# Altium PCB PA_test.PcbDoc
Units mm, origin at the board's own origin, x right, y up, seen from the top; angles counter-clockwise.
Board outline 44 x 35 mm, 4 copper layers (Top Layer, Layer 1, Layer 2, Bottom Layer), stack 1.586 mm thick; 28 components, 14 nets, 77 pads, 128 vias.
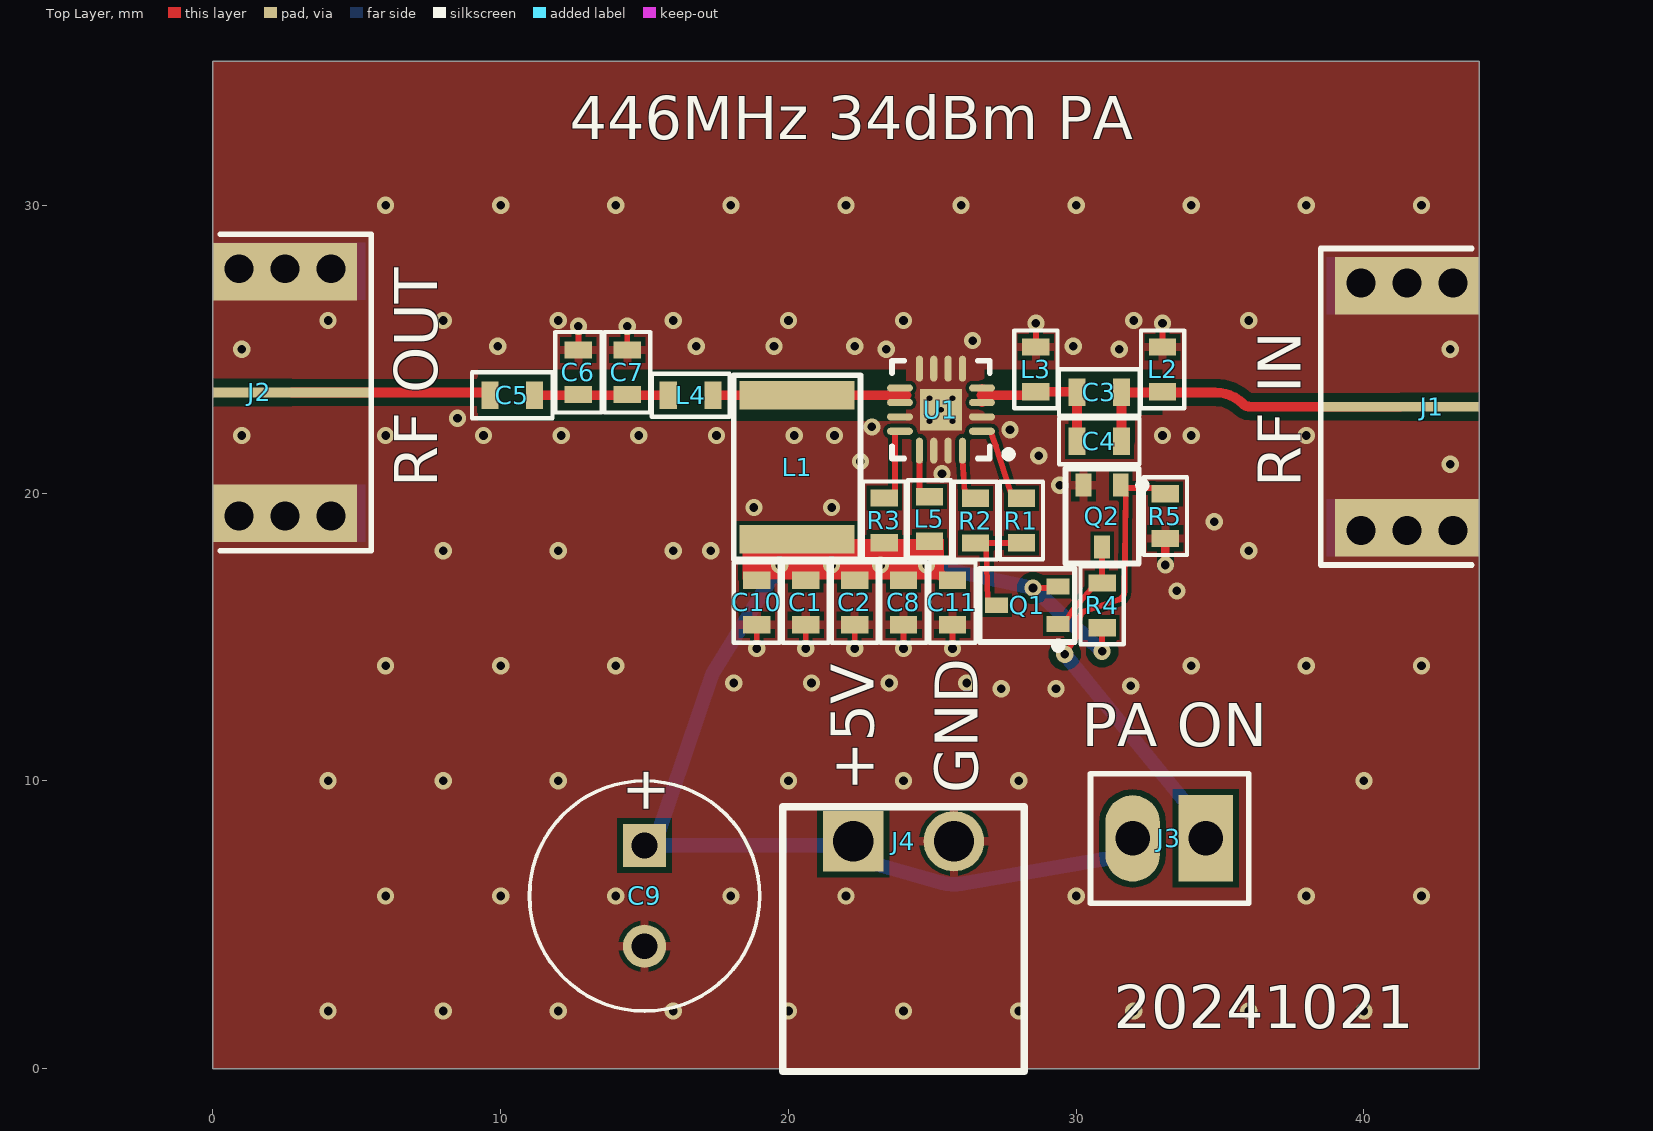
[diagram p0: Top Layer view]
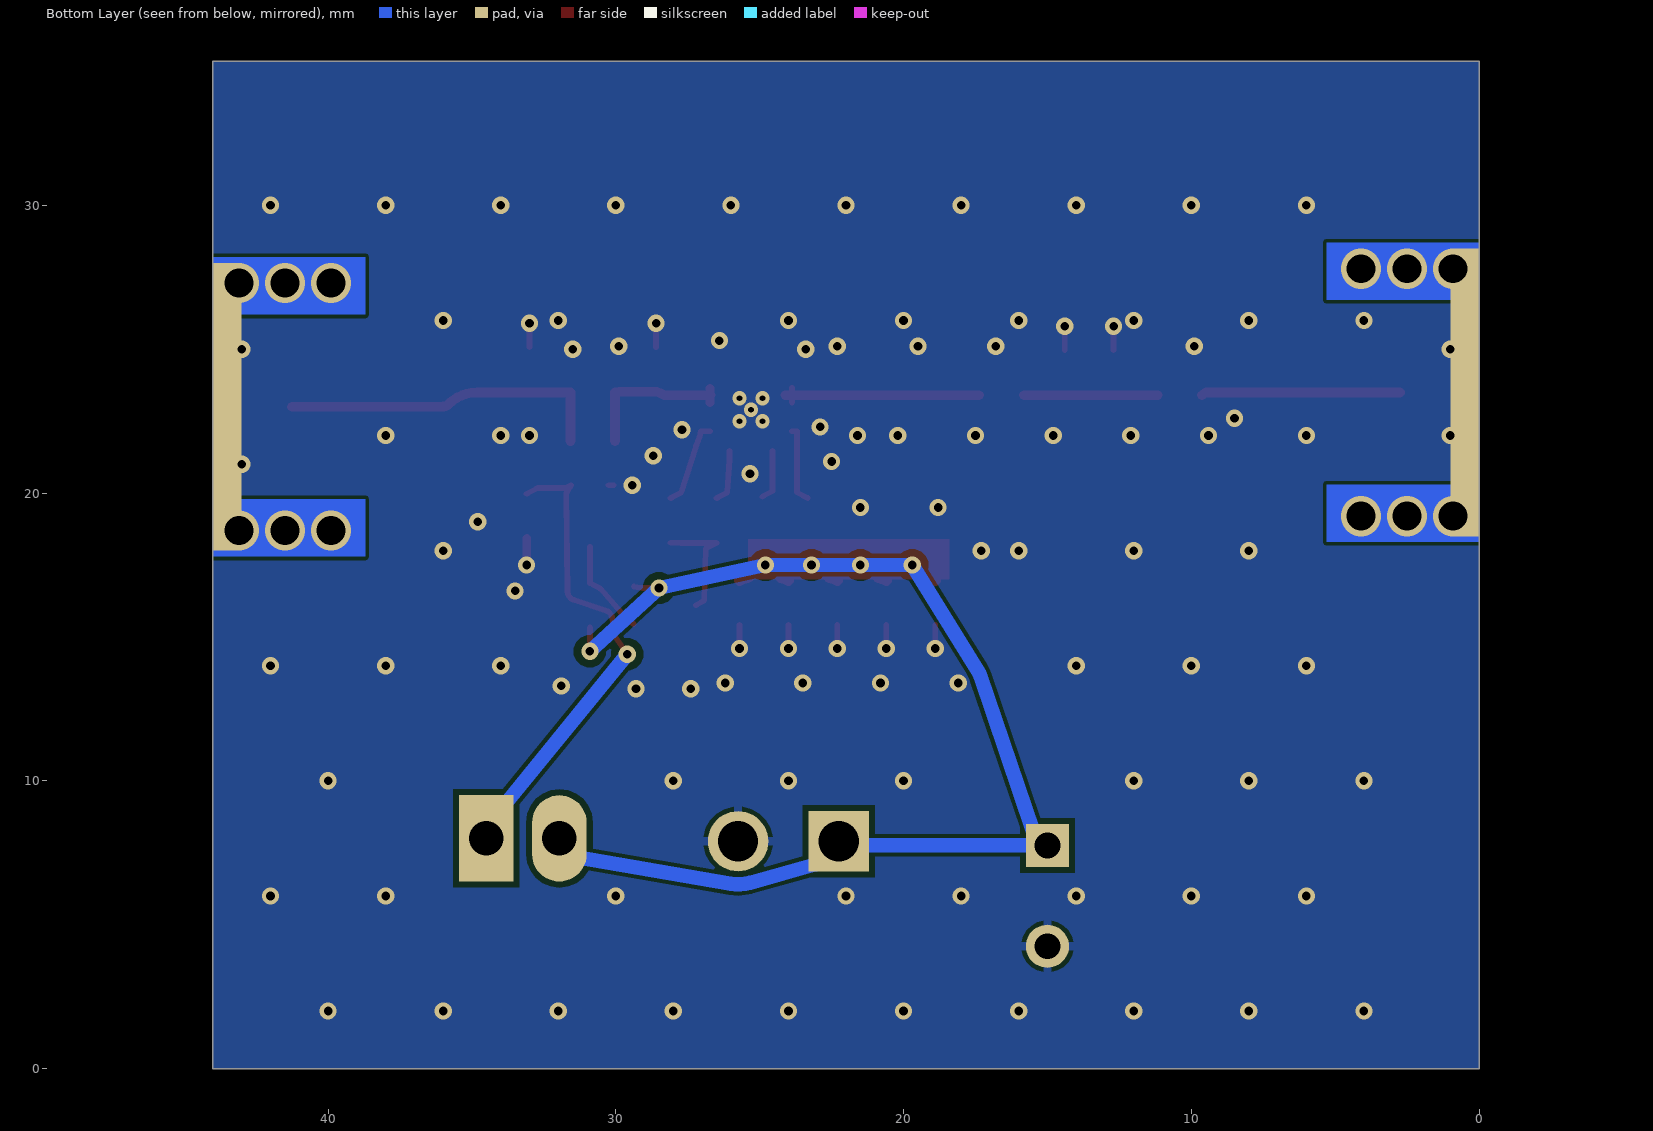
[diagram p1: Bottom Layer view, seen from below]
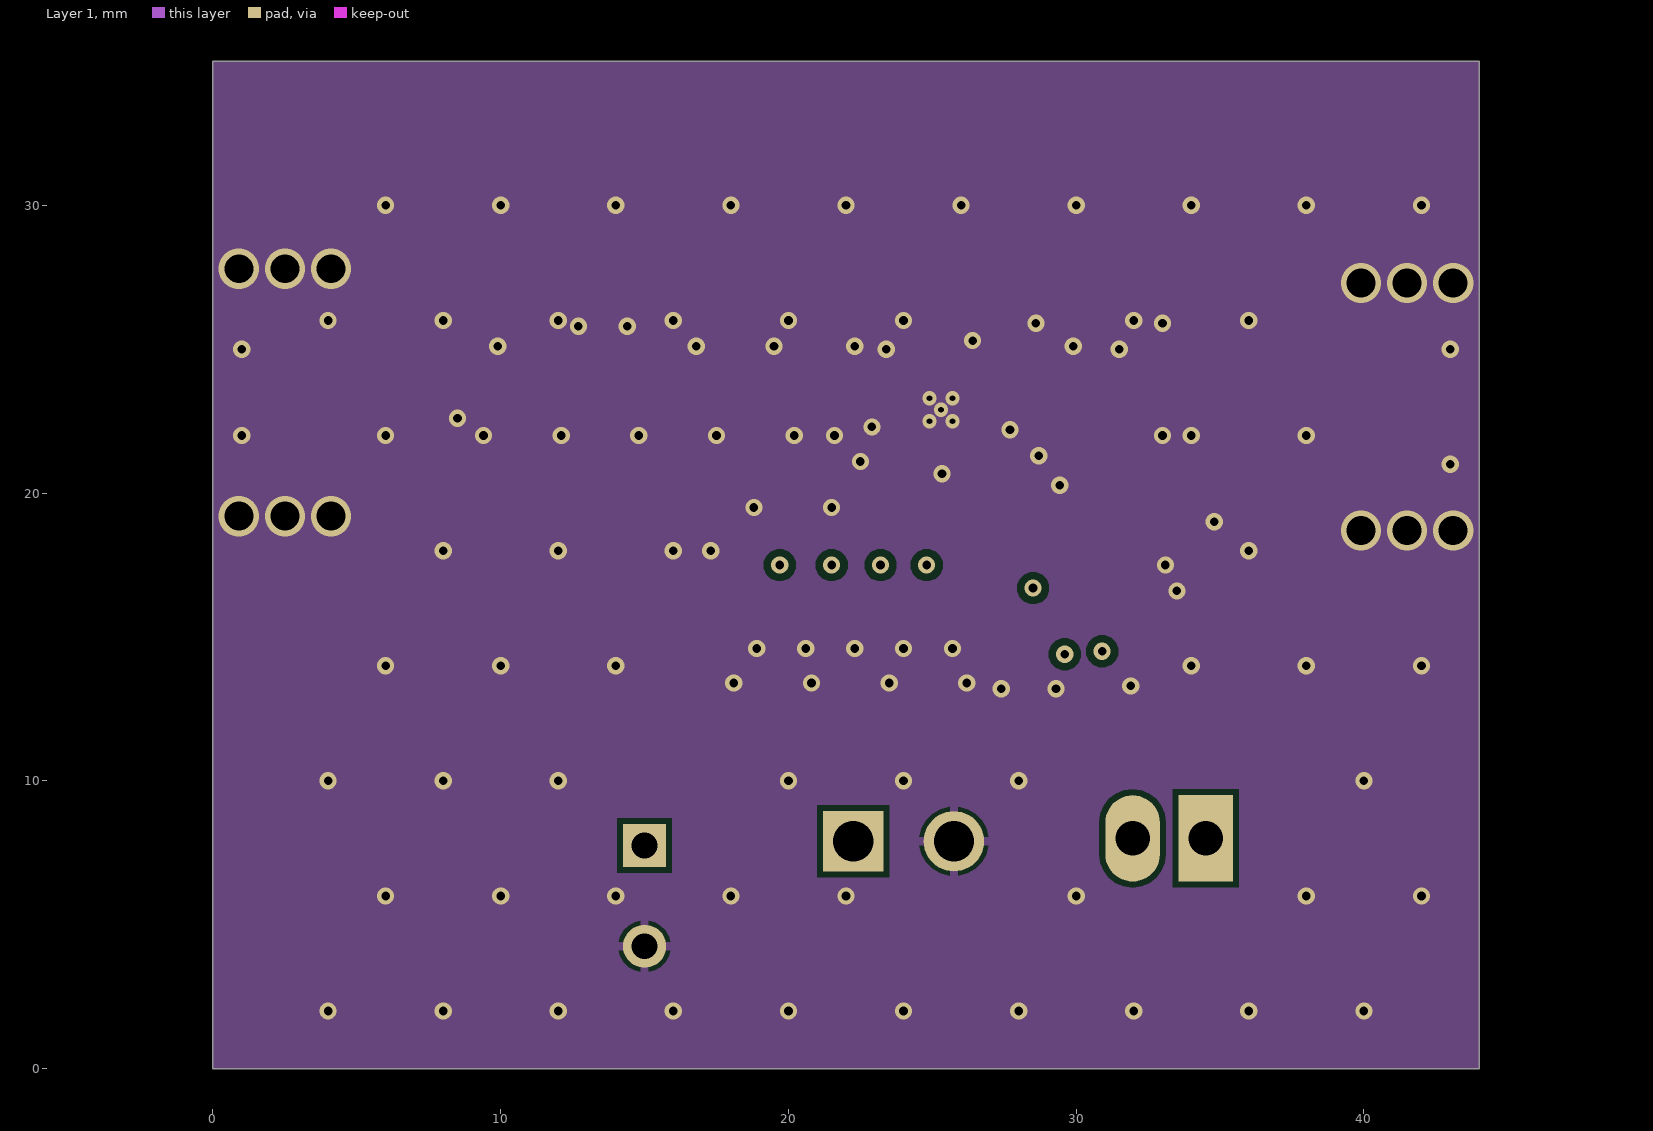
[diagram p2: Layer 1]
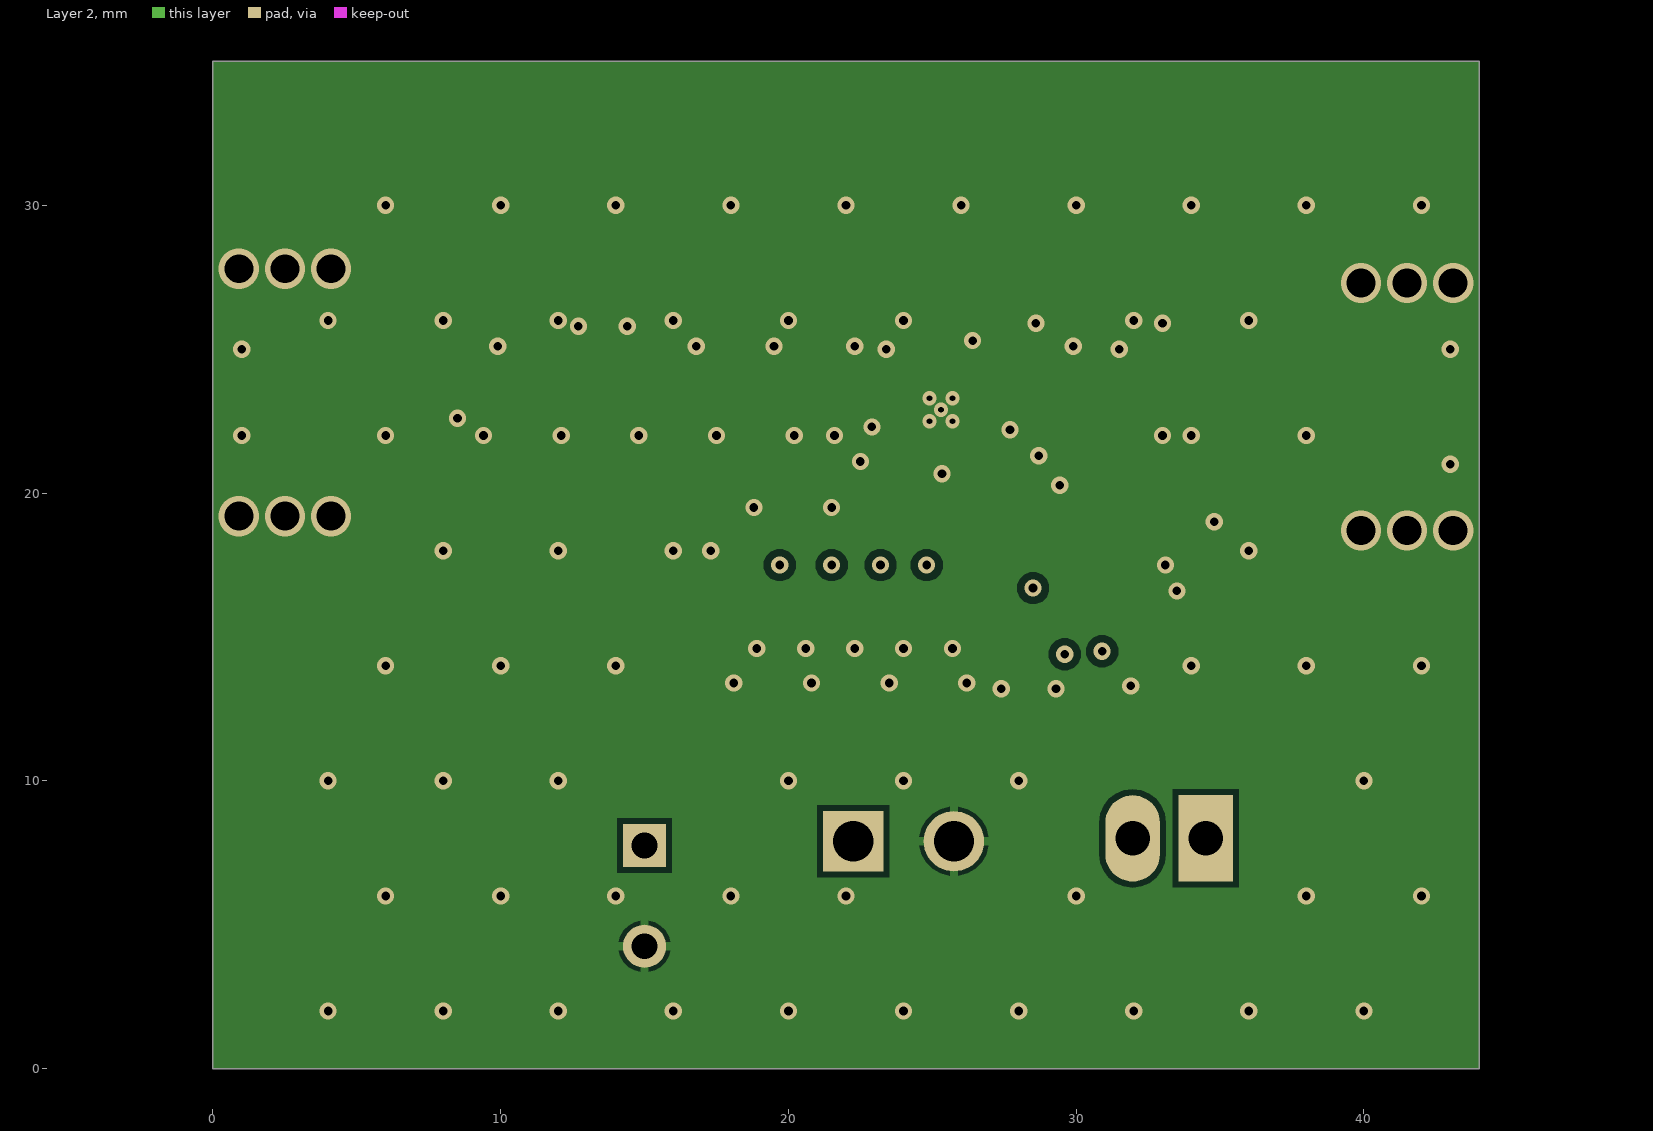
[diagram p3: Layer 2]
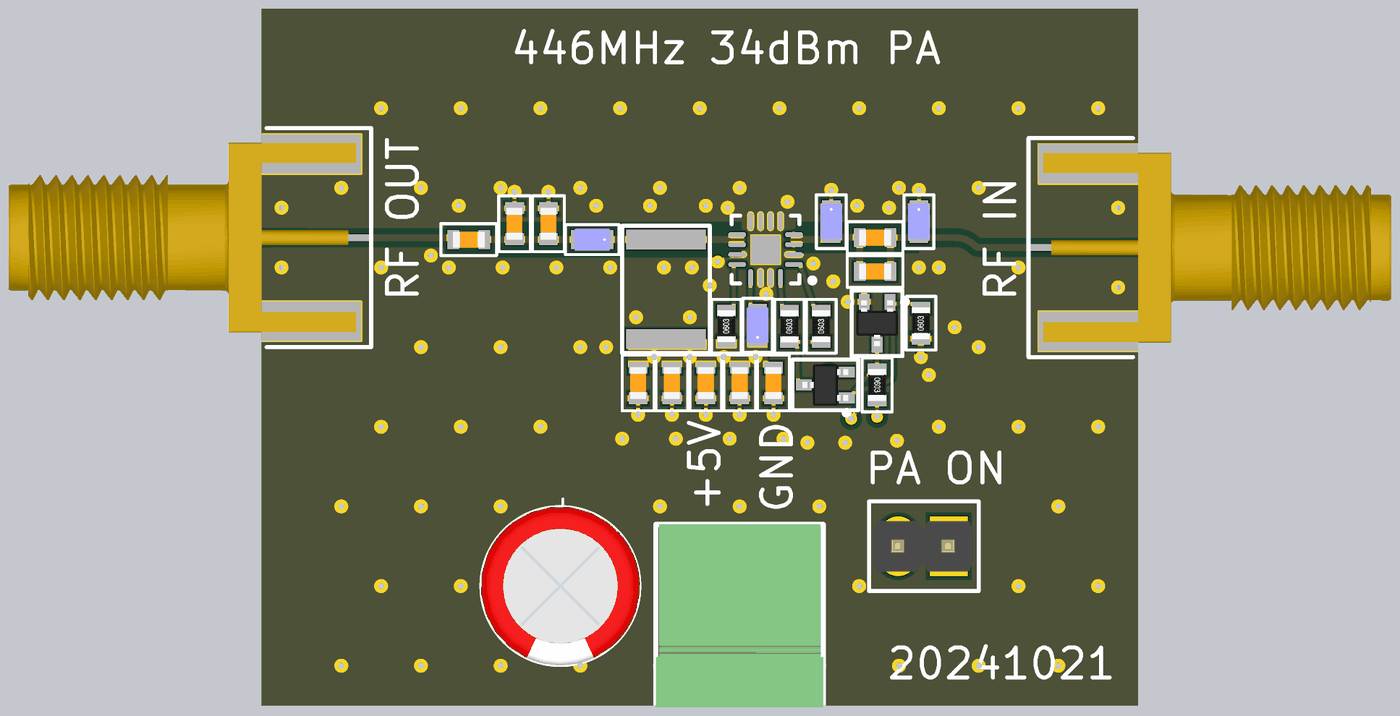
[diagram p4: 3D render of the assembled board from above, using the file's embedded part models]

## Layer stack, top to bottom
Top Solder: solder mask 0.0102, Solder Resist, Dk 3.5
Top Layer: signal copper 0.035
Dielectric 2: prepreg 0.2104, PP-006, Dk 4.1
Layer 1: signal copper 0.0152
Dielectric 1: dielectric 1.065, FR-4, Dk 4.8
Layer 2: signal copper 0.0152
Dielectric 3: prepreg 0.2104, PP-006, Dk 4.1
Bottom Layer: signal copper 0.035
Bottom Solder: solder mask 0.0102, Solder Resist, Dk 3.5

## Board outline
0,0 0,35 44,35 44,0

## Design rules (kind name [scope] priority, off if disabled: settings)
Clearance HW [InNetClass('HV')] p1: gap=0.25 ignorepadtopadclearanceinfootprint=FALSE except(0: Arc-Hole Track-Hole SMDPad-Hole THPad-Hole Via-Hole Fill-Hole Poly-Hole Region-Hole Text-Hole; 0.15: SMDPad-SMDPad)
Clearance "50 ohm GCWG" [InNetClass('50 ohm') vs InNet('GND')] p2: gap=0.3 ignorepadtopadclearanceinfootprint=FALSE except(0: Arc-Hole Track-Hole SMDPad-Hole THPad-Hole Via-Hole Fill-Hole Poly-Hole Region-Hole Text-Hole; 0.127: SMDPad-SMDPad; 0.15: SMDPad-Fill SMDPad-Poly SMDPad-Region; 0.152: Arc-Text Track-Text SMDPad-Text THPad-Text Via-Text Fill-Text Poly-Text Region-Text Text-Text; 0.2: Arc-SMDPad Arc-THPad Track-SMDPad Track-THPad SMDPad-THPad SMDPad-Via THPad-THPad; 0.254: Arc-Via Track-Via Via-Via; 0.5: THPad-Via)
Clearance [All] p3: gap=0.127 ignorepadtopadclearanceinfootprint=FALSE except(0: Arc-Hole Track-Hole SMDPad-Hole THPad-Hole Via-Hole Fill-Hole Poly-Hole Region-Hole Text-Hole; 0.089: Arc-Arc Arc-Track Track-Track; 0.152: Arc-Text Track-Text SMDPad-Text THPad-Text Via-Text Fill-Text Poly-Text Region-Text Text-Text; 0.2: Arc-SMDPad Arc-THPad Track-SMDPad Track-THPad SMDPad-THPad SMDPad-Via THPad-THPad THPad-Fill THPad-Poly THPad-Region; 0.254: Arc-Via Track-Via Via-Via Via-Fill Via-Poly Via-Region; 0.5: THPad-Via)
ComponentClearance [All] p1: gap=0.15 collisioncheckmode=3 verticalgap=0.254 showdistances=FALSE
HoleSize [All] p1: absolutevalues=TRUE maxlimit=6.3 minlimit=0.2 maxpercent=80.000 minpercent=20.000
HoleToHoleClearance HoleToHoleClearance_1 [All vs IsVia] p1: gap=0.2 allowstackedmicrovias=TRUE
HoleToHoleClearance [All] p2: gap=0.45 allowstackedmicrovias=TRUE
MinimumAnnularRing [All] p1: minimumring=0.13
MinimumSolderMaskSliver [All] p1: minsoldermaskwidth=0.1
PlaneConnect [All] p1: planeconnectstyle=Direct reliefexpansion=0.508 reliefentries=4 reliefconductorwidth=0.254 reliefairgap=0.254
PolygonConnect "Free pads to GND" [(ObjectKind = 'Pad') And (Component = 'Free') vs InNet('GND')] p1: connectstyle=Direct reliefconductorwidth=0.254 reliefentries=4 polygonreliefangle="90 Angle" airgapwidth=0.254
PolygonConnect "Footprint connection" [All vs HasFootprint('QFN50P200X200X100_HS-13N') or HasFootprint('QFN50P300X300X80_HS-17M - os') or HasFootprint('QFN32-2') or HasFootprint('MCX_SMD_vertical') or HasFootprint('CONUFL001-SMD-T') or HasFootprint('SMA-5205-TGG')] p2: connectstyle=Direct reliefconductorwidth=0.254 reliefentries=4 polygonreliefangle="90 Angle" airgapwidth=0.254
PolygonConnect "Via connection" [All vs IsVia or IsShieldingVia or IsStitchingVia] p3: connectstyle=Direct reliefconductorwidth=0.254 reliefentries=4 polygonreliefangle="90 Angle" airgapwidth=0.254
PolygonConnect [All] p4: connectstyle=Relief reliefconductorwidth=0.3 reliefentries=4 polygonreliefangle="90 Angle" airgapwidth=0.15
RoutingCorners [All] p1: cornerstyle=45-Degree minsetback=1 maxsetback=2.54
RoutingVias [All] p1: holewidth=0.3 width=0.6 viastyle="Through Hole" minholewidth=0.2 minwidth=0.4 maxholewidth=6 maxwidth=7
SilkToSilkClearance [All] p1: silktosilkclearance=0
SilkToSolderMaskClearance [IsPad] p1: minsilkscreentomaskgap=0.15 clearancetoexposedcopper=TRUE
SolderMaskExpansion SolderMaskExpansion_1 [IsVia] p1: expansion=-0.1 istentingtop=FALSE
SolderMaskExpansion [All] p2: expansion=0.05 istentingtop=FALSE
SupplyNets "Schematic Supply Nets_3" [InNet('+5V')] p1: voltage=0.000
SupplyNets "Schematic Supply Nets" [InNet('GND')] p2: voltage=0.000
UnRoutedNet [All] p1: checkbadconnections=TRUE
Width "50 ohm gcwg w" [InNetClass('50 ohm')] p1: maxlimit=0.342 minlimit=0.25 preferedwidth=0.342 toplayer_minwidth=0.342 midlayer1_maxwidth=0.25 midlayer1_prefwidth=0.25 midlayer2_maxwidth=0.25 midlayer2_prefwidth=0.25 bottomlayer_minwidth=0.342 impedanceprofiledriven=TRUE minimp=50.000000 maximp=50.000000 favimp=50.000000
Width [All] p2: maxlimit=3 minlimit=0.089 preferedwidth=0.2
21 further rules are at their usual default settings.

## Classes and differential pairs
net class "50 ohm": NetC5_2 "PA IN"

## Components (designator, comment, footprint, x,y, rotation, side; value= is the part's Value field where it differs from the comment)
C1 "1u, 25V, X7R" SMD0603 20.6,16.2 r270 top
C2 "1u, 25V, X7R" SMD0603 22.3,16.2 r270 top
C3 "10p 200V 1% C0G" SMD0603 30.8,23.5 r0 top
C4 "10p 200V 1% C0G" SMD0603 30.8,21.8 r0 top
C5 "100p, 250V, C0G" SMD0603 10.4,23.4 r180 top
C6 "47p, 50V, C0G" SMD0603 12.7,24.2 r270 top
C7 "12p 100V C0G 1%" SMD0603 14.4,24.2 r270 top
C8 "1u, 25V, X7R" SMD0603 24,16.2 r270 top
C9 "470uF, ALU 25V" WCAP-ATG8_8x11.5x3.5 15,6 r90 top
C10 "1u, 25V, X7R" SMD0603 18.9,16.2 r270 top
C11 "1u, 25V, X7R" SMD0603 25.7,16.2 r270 top
J1 "SMA-5205-TGG" SMA-5205-TGG 42,23 r270 top
J2 "SMA-5205-TGG" SMA-5205-TGG 2,23.5 r90 top
J3 "61300211121" "Header 2 2.54mm" 34.5,8 r270 top
J4 "691322110002" 691322110002 24,4.5 r0 top
L1 "22nH" Air-Inductor-25nH 20.3,20.9 r270 top
L2 "12n, 2%, 4.1GHz" "SMD0603 - L" 33,24.3 r270 top
L3 "12n, 2%, 4.1GHz" "SMD0603 - L" 28.6,24.3 r270 top
L4 "4n7, 2%, 7.9GHz" "SMD0603 - L" 16.6,23.4 r180 top
L5 "6n8, 2%, 5.8GHz" "SMD0603 - L" 24.9,19.1 r90 top
Q1 "NX3008PBKW" SOT323 28.3,16.1 r180 top
Q2 "NX3008NBKW" SOT323 30.9,19.2 r270 top
R1 "3k3, 1%" "SMD0603 - R" 28.097,19.046 r90 top
R2 "6k8, 1%" "SMD0603 - R" 26.501,19.044 r90 top
R3 "0R" "SMD0603 - R" 23.332,19.052 r90 top
R4 "100k, 1%" "SMD0603 - R" 30.9,16.1 r270 top
R5 "100k, 1%" "SMD0603 - R" 33.1,19.2 r90 top
U1 "GRF5504" "QFN50P300X300X80_HS-17M - OS" 25.3,22.9 r180 top

## Footprints (in the part's own frame and the unit in brackets; to place one, negate y for a bottom-side part, rotate by r counter-clockwise, add the part's x,y. Pads: shape width x height; smd on the part's side, far side on the other; paste and mask are expansions set on the pad)
691322110002 [mm] "Horizontal PCB Header, pitch 3.5mm, 02p"
  rect 2.1x2.1 hole 1.4: 1(-1.75,3.4)
  round 2.1 hole 1.4: 2(1.75,3.4)
  silkscreen extent -4.2,-4.6 4.2,4.6, body extent -4.2,-4.6 4.2,4.6, height 7.3
Air-Inductor-25nH [mm]
  rect 1x4 smd mask+0.05: 1(-2.5,0) 2(2.5,0)
  silkscreen extent -3.2,-2.2 3.2,2.2
"Header 2 2.54mm" [mm]
  rect 3x1.9 hole 1.2: 1(0,0)
  oval 3x1.9 hole 1.2: 2(0,-2.54)
  silkscreen extent -2.25,-4 2.25,1.5, body extent -1.27,-3.84 1.27,1.24, height 8.67
"QFN50P300X300X80_HS-17M - OS" [mm] "QFN, 16-Leads, Body 3,00x3,00mm, Pitch 0,50mm, Thermal Pad 1,45x1,45mm, IPC Low Density"
  oval 0.9x0.25 smd: 1(-1.425,0.75) 2(-1.425,0.25) 3(-1.425,-0.25) 4(-1.425,-0.75) 9(1.425,-0.75) 10(1.425,-0.25) 11(1.425,0.25) 12(1.425,0.75)
  oval 0.25x0.9 smd: 5(-0.75,-1.425) 6(-0.25,-1.425) 7(0.25,-1.425) 8(0.75,-1.425) 13(0.75,1.425) 14(0.25,1.425) 15(-0.25,1.425) 16(-0.75,1.425)
  rect 1.45x1.45 smd: 17(0,0)
  silkscreen extent -2.48,-1.7 1.7,1.7, body extent -1.55,-1.55 1.55,1.55, height 0.8
SMA-5205-TGG [mm]
  rect 0.342x5.5 smd: 1(0,-0.75)
  rect 2x5 smd: 2(-4.2,-0.5) 3(4.2,-0.5)
  rect 10x1 smd far side: 4(0,1.5)
  Bottom Layer region: -5.2,-3.3 -3.2,-3.3 -3.2,2 -5.2,2
  Bottom Layer region: 5.21,2 3.21,2 3.21,-3.3 5.21,-3.3
  silkscreen extent -5.5,-3.5 5.5,1.75, body extent -4.76,-2.75 4.76,14.7, height 4.41
SMD0603 [mm] "2-Leads, Body 1,60x0,85mm(0603), IPC Medium Density"
  rect 0.6x0.95 smd: 1(-0.775,0) 2(0.775,0)
  silkscreen extent -1.4,-0.8 1.4,0.8, body extent -0.8,-0.4 0.8,0.4, height 0.7
"SMD0603 - L" [mm] "2-Leads, Body 1,60x0,85mm(0603), IPC Medium Density"
  rect 0.6x0.95 smd: 1(-0.775,0) 2(0.775,0)
  silkscreen extent -1.35,-0.75 1.35,0.75, body extent -0.88,-0.54 0.87,0.55, height 0.93
"SMD0603 - R" [mm] "2-Leads, Body 1,60x0,85mm(0603), IPC Medium Density"
  rect 0.6x0.95 smd: 1(-0.775,0) 2(0.775,0)
  silkscreen extent -1.35,-0.75 1.35,0.75, body extent -0.8,-0.45 0.8,0.45, height 0.5
SOT323 [mm] "SOT323, 3-Leads, Body 2,00x2,10mm, Pitch 0,65mm, IPC Medium Density"
  rect 0.8x0.55 smd: 1(-1.075,0.65) 2(-1.075,-0.65) 3(1.075,0)
  silkscreen extent -1.65,-1.28 1.65,1.52, body extent -1.15,-1.05 1.15,1.05, height 1
WCAP-ATG8_8x11.5x3.5 [mm] "Aluminum Electrolytic Capacitors, 8x11.5mm"
  rect 1.5x1.5 hole 0.9: 1(1.75,0)
  round 1.5 hole 0.9: 2(-1.75,0)
  silkscreen extent -4,-4 4,4, body extent -3.99,-4 4,4, height 11.81

## Part data
C1 C2 C8 C10 C11: library part CGA3E1X7R1E105K080AC, "CAP CER 1UF 25V X7R 0603", Capacitance=1u, Manufacturer="TDK Corporation", Operating Temperature="-55°C ~ 125°C", Package / Case="0603 (1608 Metric)", Ratings=AEC-Q200, Supplier Part Number 1=810-CGA3E1X7R1E105K, Temperature Coefficient=X7R, Tolerance=±10%, Voltage - Rated=25V, Applications=Automotive, Category=Capacitors, ComponentLink1Description=https://product.tdk.com/info/en/catalog/datasheets/mlcc_automotive_general_en.pdf, ComponentLink1URL=https://product.tdk.com/info/en/catalog/datasheets/mlcc_automotive_general_en.pdf, Failure Rate=-, Features=-, Height - Seated (Max)=-, Lead Spacing=-, Lead Style=-, Manufacturer Part Number=CGA3E1X7R1E105K080AC, Mounting Type="Surface Mount, MLCC", Packaging="Cut Tape (CT)", Part Status=Active, Pricing 1="1=0.2, 10=0.135, 100=0.0686, 500=0.04696, 1000=0.04154 (USD)", RoHS="RoHS Compliant", Size / Dimension="0.063\" L x 0.032\" W (1.60mm x 0.80mm)", Stock 1=109509, Supplier 1=Mouser, Supplier 2=Farnell, Supplier 3=Digi-Key, Supplier Part Number 2=2346962, Supplier Part Number 3=445-6931-1-ND, Thickness (Max)="0.035\" (0.90mm)"
C3 C4: library part 06032U100FAT2A, "Cap Ceramic 10pF 200V C0G 1% Pad SMD 0603 125°C Ultra Low ESR T/R", Capacitance=10p, Manufacturer="Kyocera AVX", Supplier Part Number 1=581-06032U100FAT2A, Category="Ceramic Capacitors", ComponentLink1Description=https://datasheet.ciiva.com/219/useries-219573.pdf?src-supplier=Digi-Key, ComponentLink1URL=https://datasheet.ciiva.com/219/useries-219573.pdf?src-supplier=Digi-Key, ComponentLink2Description=https://datasheet.ciiva.com/16209/useries-16209209.pdf?src-supplier=Future+Electronics, ComponentLink2URL=https://datasheet.ciiva.com/16209/useries-16209209.pdf?src-supplier=Future+Electronics, Manufacturer Part Number=06032U100FAT2A, Pricing 1="1=0.33, 10=0.227, 50=0.227, 100=0.137, 1000=0.087, 10000=0.07 (USD)", RoHS=Yes, Stock 1=12241, Supplier 1=Mouser, Supplier 2="Arrow Electronics", Supplier 3=Newark, Supplier Part Number 2=06032U100FAT2A, Supplier Part Number 3=96Y8278
C5: library part 885342006003, "CAP CER 100PF 250V C0G/NP0 0603", Capacitance=100p, Manufacturer="Wurth Electronics Inc.", Operating Temperature="-55°C ~ 125°C", Package / Case="0603 (1608 Metric)", Ratings=-, Supplier Part Number 1=732-12167-1-ND, Temperature Coefficient="C0G, NP0", Tolerance=±5%, Voltage - Rated=250V, Applications="General Purpose", Category=Capacitors, ComponentLink1Description=https://katalog.we-online.de/pbs/datasheet/885342006003.pdf, ComponentLink1URL=https://katalog.we-online.de/pbs/datasheet/885342006003.pdf, Failure Rate=-, Features=-, Height - Seated (Max)=-, Lead Spacing=-, Lead Style=-, Manufacturer Part Number=885342006003, Mounting Type="Surface Mount, MLCC", Notification="Current market demand for these product types have resulted in fluctuating and extending lead times. Lead times may differ.", Packaging="Cut Tape (CT)", Part Status=Active, Pricing 1="1=0.1, 10=0.043, 100=0.0385, 500=0.03406 (USD)", RoHS="RoHS Compliant", Size / Dimension="0.063\" L x 0.031\" W (1.60mm x 0.80mm)", Stock 1=43, Supplier 1=Digi-Key, Supplier 2=Farnell, Supplier 3=Mouser, Supplier Part Number 2=2812519, Supplier Part Number 3=710-885342006003, Thickness (Max)="0.034\" (0.87mm)"
C6: library part C0603C470J5GACAUTO, "CAP CER 47PF 50V C0G/NP0 0603", Capacitance=47p, Manufacturer=KEMET, Operating Temperature="-55°C ~ 125°C", Package / Case="0603 (1608 Metric)", Ratings=AEC-Q200, Supplier Part Number 1=80-C0603C470J5G, Temperature Coefficient="C0G, NP0", Tolerance=±5%, Voltage - Rated=50V, Applications=Automotive, Category=Capacitors, ComponentLink1Description=https://search.kemet.com/component-edge/download/datasheet/C0603C470J5GACAUTO.pdf, ComponentLink1URL=https://search.kemet.com/component-edge/download/datasheet/C0603C470J5GACAUTO.pdf, Failure Rate=-, Features=-, Height - Seated (Max)=-, Lead Spacing=-, Lead Style=-, Manufacturer Part Number=C0603C470J5GACAUTO, Mounting Type="Surface Mount, MLCC", Packaging="Cut Tape (CT)", Part Status=Active, Pricing 1="1=0.12, 10=0.088, 100=0.0391, 500=0.02792, 1000=0.02193 (USD)", RoHS="RoHS Compliant", Size / Dimension="0.063\" L x 0.032\" W (1.60mm x 0.80mm)", Stock 1=21519, Supplier 1=Mouser, Supplier 2=Farnell, Supplier 3=Digi-Key, Supplier 4=TME, Supplier Part Number 2=1414639, Supplier Part Number 3=399-6890-1-ND, Supplier Part Number 4=C0603C470J5GAC, Thickness (Max)="0.034\" (0.87mm)"
C7: library part 06031U120FAT2A, "Cap Ceramic 12pF 100V C0G 1% SMD 0603 125°C T/R", Capacitance=12p, Case Code (Imperial)=0603, Case Code (Metric)=1608, Dielectric=C0G, Manufacturer="Kyocera AVX", Max Operating Temperature=125°C, Min Operating Temperature=-55°C, Package Quantity=4000, Supplier Part Number 1=581-06031U120FAT2A, Tolerance=1%, Voltage Rating=100V, Case/Package=0603, Category="Ceramic Capacitors", ComponentLink1Description=https://datasheet.ciiva.com/208/useries-208490.pdf?src-supplier=Digi-Key, ComponentLink1URL=https://datasheet.ciiva.com/208/useries-208490.pdf?src-supplier=Digi-Key, Construction=Flat, Depth=0.76mm, Length=1.6mm, Manufacturer Part Number=06031U120FAT2A, Mounting Technology="Surface Mount", Packaging="Tape and Reel", Pricing 1="1=0.33, 10=0.227, 50=0.227, 100=0.137, 1000=0.087, 10000=0.07 (USD)", Radiation Hardening=No, RoHS=Yes, RoHS Compliant=Yes, Series=U, Stock 1=6418, Supplier 1=Mouser, Termination=SMD/SMT, Voltage Rating (DC)=100V, Width=0.81mm
C9: library part 860010474013, "WURTH ELEKTRONIK - 860010474013 - CAP, ALU ELEC, 470UF, 25V, RADIAL", Capacitance=470u, Capacitance Tolerance="± 20%", Capacitor Terminals="Radial Leaded", Lifetime @ Temperature="2000 hours @ 85", Manufacturer="WURTH ELEKTRONIK", Operating Temperature Max=85, Operating Temperature Min=-40, Supplier Part Number 1=2465681, Voltage Rating=25V, Automotive Qualification Standard=-, ComponentLink1Description=http://www.farnell.com/datasheets/1879524.pdf, ComponentLink1URL=http://www.farnell.com/datasheets/1879524.pdf, Diameter=8, ESR=-, Height=11.5, Lead Spacing=3.5, Manufacturer Part Number=860010474013, MSL="MSL 1 - Unlimited", Packaging="Each<!--FANDB--><div class=\"features-and-benefits-container\"><div class=\"features-and-benefits-desc-container\"><span class=\"features-and-benefits-container-desc\">Electrolytic Capacitor, 470 µF, 25 V, WCAP-ATG8 Series, ± 20%, Radial Leaded, 8 mm</span></div></div>", Pricing 1="1=0.313, 3=0.282, 5=0.257, 10=0.232, 20=0.23, 50=0.189, 250=0.18 (GBP)", Product Range="WCAP-ATG8 Series", RoHS=YES, RoHS Phthalates Compliant=Yes, Stock 1=134, Supplier 1=Farnell, Supplier 2=Digi-Key, Supplier 3=Mouser, Supplier Part Number 2=732-8636-1-ND, Supplier Part Number 3=710-860010474013, SVHC="No SVHC (07-Jul-2017)"
J1 J2: "DC to 12.4 GHz, low cost SMA", Manufacturer=Schmid-M, Supplier 1="ATD Electronic", Supplier Part Number 1=SMA-5205-TGG
J3: "CONN HEADER 2 POS 2.54", Current Rating=3A, Insulation Color=Black, Manufacturer="Wurth Electronics Inc.", Material Flammability Rating="UL94 V-0", Operating Temperature="-40°C ~ 125°C", Supplier Part Number 1=710-61300211121, Voltage Rating=250V, Applications=-, Category="Connectors, Interconnects", ComponentLink1Description=https://katalog.we-online.de/em/datasheet/6130xx11121.pdf, ComponentLink1URL=https://katalog.we-online.de/em/datasheet/6130xx11121.pdf, Connector Type=Header, Contact Finish - Mating=Gold, Contact Finish - Post=-, Contact Finish Thickness - Mating=-, Contact Finish Thickness - Post=-, Contact Length - Mating="0.236\" (6.00mm)", Contact Length - Post="0.118\" (3.00mm)", Contact Material="Copper Alloy", Contact Shape=Square, Contact Type="Male Pin", Fastening Type=Push-Pull, Features=-, Ingress Protection=-, Insulation Height="0.100\" (2.54mm)", Insulation Material="Polybutylene Terephthalate (PBT)", Manufacturer Part Number=61300211121, Mated Stacking Heights=-, Mounting Type="Through Hole", Number of Positions=2, Number of Positions Loaded=All, Number of Rows=1, Overall Contact Length="0.454\" (11.54mm)", Packaging=Bulk, Part Status=Active, Pitch - Mating="0.100\" (2.54mm)", Pricing 1="1=0.13, 10=0.106, 25=0.088, 50=0.074, 100=0.067, 1000=0.061 (USD)", RoHS="RoHS Compliant", Row Spacing - Mating=-, Shrouding=Unshrouded, Stock 1=164911, Style="Board to Board or Cable", Supplier 1=Mouser, Supplier 2=Farnell, Supplier 3=Digi-Key, Supplier Part Number 2=2356153, Supplier Part Number 3=732-5315-ND, Termination=Solder
J4: "WR-TBL Serie 3221 - 3.50 mm Horizontal PCB Header, 02p", Supplier Part Number 1=732-2769-ND, ComponentLink1Description=Manufacturer, ComponentLink1URL=http://www.we-online.de, ComponentLink2Description=Datasheet, ComponentLink2URL=http://katalog.we-online.de/em/datasheet/6913221100xx.pdf, Part Number=691322110002, Pin Number=02p, Pitch="3.5 mm", Published Date="Jan 2017", Publisher="Wurth Elektronik", Supplier 1=Digi-Key, Supplier 2=Farnell, Supplier 3=Mouser, Supplier Part Number 2=1841315, Supplier Part Number 3=710-691322110002
L1: library part Air-Inductor_20nH
L2 L3: library part 0603HP-12NXGLU, "Fixed Inductors 0603HP Hi Perfrmnce 12 nH 2 % 1.1 A", Case Code (Imperial)=0603, Case Code (Metric)=1608, Current Rating=1.1A, DC Resistance (DCR)=88mR, Inductance=12n, Inductance Tolerance=2%, Manufacturer=Coilcraft, Max Operating Temperature=125°C, Min Operating Temperature=-40°C, Self Resonant Frequency=4.1GHz, Supplier Part Number 1=994-0603HP-12NXGLU, Test Frequency=250MHz, Case/Package=0603, ComponentLink1Description=https://datasheet.ciiva.com/13167/0603hp-13167775.pdf?src-supplier=Mouser, ComponentLink1URL=https://datasheet.ciiva.com/13167/0603hp-13167775.pdf?src-supplier=Mouser, ComponentLink2Description=https://datasheet.ciiva.com/22680/1681881-22680847.pdf?src-supplier=Element14, ComponentLink2URL=https://datasheet.ciiva.com/22680/1681881-22680847.pdf?src-supplier=Element14, Core Material=Ceramic, Height=0.94mm, Lead Free="Contains Lead", Length=1.75mm, Manufacturer Part Number=0603HP-12NXGLU, Max DC Current=1.1A, Mount="Surface Mount", Packaging="Cut Tape", Pricing 1="1=1.18000, 10=1.18000, 50=1.18000, 100=1.18000, 200=0.89000, 500=0.66000, 1000=0.44000, 2000=0.40500 (USD)", Q Factor=91, REACH SVHC="No SVHC", RoHS=Yes, Stock 1=1052, Supplier 1=Mouser, Supplier 2=Farnell, Supplier Part Number 2=2286146, Termination=SMD/SMT, Tolerance=2%, Width=1.09mm
L4: library part 0603HP-4N7XGLU, "Fixed Inductors 0603HP Hi Perfrmnce 4.7 nH 2 % 1.1 A", Case Code (Imperial)=0603, Case Code (Metric)=1608, Current Rating=1.1A, DC Resistance (DCR)=100mR, Inductance=4n7, Inductance Tolerance=2%, Manufacturer=Coilcraft, Max Operating Temperature=125°C, Min Operating Temperature=-40°C, Self Resonant Frequency=7.9GHz, Supplier Part Number 1=994-0603HP-4N7XGLU, Test Frequency=250MHz, Case/Package=0603, ComponentLink1Description=https://datasheet.ciiva.com/22680/1681881-22680887.pdf?src-supplier=Element14, ComponentLink1URL=https://datasheet.ciiva.com/22680/1681881-22680887.pdf?src-supplier=Element14, Core Material=Ceramic, Height=0.94mm, Lead Free="Contains Lead", Length=1.75mm, Manufacturer Part Number=0603HP-4N7XGLU, Max DC Current=1.1A, Mount="Surface Mount", Packaging="Cut Tape", Pricing 1="1=1.50000, 10=1.40000, 50=1.22000, 100=1.12000, 200=1.06000, 500=0.74800, 1000=0.47800, 2000=0.40500 (USD)", Q Factor=75, REACH SVHC="No SVHC", RoHS=Yes, Stock 1=884, Supplier 1=Mouser, Supplier 2=Farnell, Supplier Part Number 2=2286132, Termination=SMD/SMT, Tolerance=2%, Width=1.09mm
L5: library part 0603HP-6N8XGLU, "Fixed Inductors RF Chip Inductor 6.8 nH 2 % 1.4 A", Case Code (Imperial)=0603, Case Code (Metric)=1608, Current Rating=1.4A, DC Resistance (DCR)=42mR, Inductance=6n8, Inductance Tolerance=2%, Manufacturer=Coilcraft, Max Operating Temperature=125°C, Min Operating Temperature=-40°C, Self Resonant Frequency=5.8GHz, Supplier Part Number 1=994-0603HP-6N8XGLU, Test Frequency=250MHz, Case/Package=0603, ComponentLink1Description=https://datasheet.ciiva.com/22680/1681881-22680901.pdf?src-supplier=Element14, ComponentLink1URL=https://datasheet.ciiva.com/22680/1681881-22680901.pdf?src-supplier=Element14, ComponentLink2Description=https://datasheet.ciiva.com/13143/0603hp-13143195.pdf?src-supplier=Mouser, ComponentLink2URL=https://datasheet.ciiva.com/13143/0603hp-13143195.pdf?src-supplier=Mouser, ComponentLink3Description=https://datasheet.ciiva.com/22709/1681881-22709629.pdf?src-supplier=Element14, ComponentLink3URL=https://datasheet.ciiva.com/22709/1681881-22709629.pdf?src-supplier=Element14, Core Material=Ceramic, Height=0.94mm, Lead Free="Contains Lead", Length=1.75mm, Manufacturer Part Number=0603HP-6N8XGLU, Max DC Current=1.4A, Mount="Surface Mount", Packaging="Cut Tape", Pricing 1="1=1.18000, 10=1.18000, 50=1.18000, 100=1.18000, 200=0.89000, 500=0.66000, 1000=0.44000, 2000=0.40500 (USD)", Q Factor=143, REACH SVHC="No SVHC", RoHS=Yes, Stock 1=1868, Supplier 1=Mouser, Supplier 2=Farnell, Supplier Part Number 2=2286136, Termination=SMD/SMT, Tolerance=2%, Width=1.09mm
Q1: "NXP - NX3008PBKW - MOSFET, P CH, 30V, 200MA, SOT323", Continuous Drain Current Id=-200, Drain Source Voltage Vds=-30, Manufacturer=NXP, On Resistance Rds(on)=2.8, Operating Temperature Max=150, Operating Temperature Min=-55, Operating Temperature Range="-55°C to +150", Power Dissipation Pd=260, Pulse Current Idm=-0.8, Rds(on) Test Voltage Vgs=-4.5, Supplier Part Number 1=2069551, Threshold Voltage Vgs=-900, Transistor Case Style=SOT-323, Voltage Vgs th Max="8V<!--FANDB--><div class=\"features-and-benefits-container\"><div class=\"features-and-benefits-description\"><span class=\"features-benefits-value\">The NX3008PBKW is a P-channel enhancement mode Field-Effect Transistor (FET) in surface mount plastic package using Trench MOSFET technology. Suitable for relay driver, high-speed line driver and high-side loadswitch.</span></div><div class=\"features-and-benefits-list\"><ul class=\"features-and-benefits-list-list\"><li class=\"features-and-benefits-list-item\">Logic-level compatible</li><li class=\"features-and-benefits-list-item\">Very fast switching</li><li class=\"features-and-benefits-list-item\">AEC-Q101 Qualified</li><li class=\"features-and-benefits-list-item\">Up to 1", Automotive Qualification Standard=-, ComponentLink1Description=http://www.farnell.com/datasheets/1508398.pdf, ComponentLink1URL=http://www.farnell.com/datasheets/1508398.pdf, Manufacturer Part Number=NX3008PBKW, MSL="MSL 1 - Unlimited", No. of Pins=3, Pricing 1="1=0.037, 25=0.0347, 100=0.0323, 250=0.03, 500=0.0294, 2000=0.0288, 4000=0.0282, 20000=0.0276 (GBP)", Product Range=-, RoHS=YES, Stock 1=18626, Supplier 1=Farnell, Supplier 2=Digi-Key, Supplier Part Number 2=568-10503-1-ND, SVHC="No SVHC (17-Dec-2015)", Transistor Polarity="P Channel"
Q2: "NXP - NX3008NBKW - MOSFET, N CH, 30V, 350MA, SOT323", Continuous Drain Current Id=350, Drain Source Voltage Vds=30, Manufacturer=NXP, On Resistance Rds(on)=1, Operating Temperature Max=150, Operating Temperature Min=-55, Operating Temperature Range="-55°C to +150", Power Dissipation Pd=260, Pulse Current Idm=-0.8, Rds(on) Test Voltage Vgs=4.5, Supplier Part Number 1=771-NX3008NBKW,115, Threshold Voltage Vgs=900, Transistor Case Style=SOT-323, Voltage Vgs th Max=8, Automotive Qualification Standard=-, ComponentLink1Description=http://www.farnell.com/datasheets/1508392.pdf, ComponentLink1URL=http://www.farnell.com/datasheets/1508392.pdf, Manufacturer Part Number=NX3008NBKW, MSL="MSL 1 - Unlimited", No. of Pins=3, Pricing 1="1=0.0425, 25=0.0385, 100=0.0347, 250=0.0334, 500=0.0312, 2000=0.0291, 4000=0.0282, 20000=0.0273 (GBP)", Product Range=-, RoHS=YES, Stock 1=4764, Supplier 1=Mouser, Supplier 2=Farnell, Supplier 3=Arrow, Supplier Part Number 2=2069546, Supplier Part Number 3=NX3008NBKW,115, SVHC="No SVHC (17-Dec-2015)", Transistor Polarity="N Channel"
R1: library part RC0603FR-073K3L, "YAGEO - RC0603FR-073K3L - SMD Chip Resistor, 0603 [1608 Metric], 3.3 kohm, RC Series, 75 V, Thick Film, 100 mW", Case Code (Imperial)=0603, Case Code (Metric)=1608, Manufacturer=Yageo, Max Operating Temperature=155°C, Max Power Dissipation=100mW, Min Operating Temperature=-55°C, Package Quantity=1, Resistance=3k3, Supplier Part Number 1=603-RC0603FR-073K3L, Temperature Coefficient=100ppm/°C, Tolerance=1%, Voltage Rating=50V, Case/Package=0603, Category="Chip SMD Resistors", ComponentLink1Description=https://datasheet.ciiva.com/2453/pyu-r-int-thick-7-2453926.pdf?src-supplier=Digi-Key, ComponentLink1URL=https://datasheet.ciiva.com/2453/pyu-r-int-thick-7-2453926.pdf?src-supplier=Digi-Key, ComponentLink2Description=https://datasheet.ciiva.com/2453/pyu-r-int-thick-7-2453927.pdf?src-supplier=Digi-Key, ComponentLink2URL=https://datasheet.ciiva.com/2453/pyu-r-int-thick-7-2453927.pdf?src-supplier=Digi-Key, ComponentLink3Description=https://datasheet.ciiva.com/7746/443971-7746344.pdf?src-supplier=Element14, ComponentLink3URL=https://datasheet.ciiva.com/7746/443971-7746344.pdf?src-supplier=Element14, ComponentLink4Description=https://datasheet.ciiva.com/7746/1686128-7746345.pdf?src-supplier=Element14, ComponentLink4URL=https://datasheet.ciiva.com/7746/1686128-7746345.pdf?src-supplier=Element14, ComponentLink5Description=https://datasheet.ciiva.com/46440/1868787-46440905.pdf?src-supplier=Element14, ComponentLink5URL=https://datasheet.ciiva.com/46440/1868787-46440905.pdf?src-supplier=Element14, ComponentLink6Description=https://datasheet.ciiva.com/7746/443971-7746346.pdf?src-supplier=Element14, ComponentLink6URL=https://datasheet.ciiva.com/7746/443971-7746346.pdf?src-supplier=Element14, Composition="Thick Film", Depth=0.8mm, Features="Moisture Resistant", Height=0.45mm, Lead Free="Lead Free", Length=1.6mm, Manufacturer Part Number=RC0603FR-073K3L, Military Standard=Not, Number of Pins=2, Number of Terminations=2, Packaging="Tape and Reel", Power Rating=100mW, Pricing 1="1=0,10000, 10=0,01800, 100=0,00600, 1000=0,00500, 5000=0,00300, 10000=0,00300 (USD)", REACH SVHC="No SVHC", RoHS=Yes, Stock 1=695285, Supplier 1=Mouser, Supplier 2=Farnell, Supplier 3=Digi-Key, Supplier Part Number 2=2421870, Supplier Part Number 3=311-3.30KHRCT-ND, Termination=SMD/SMT, Voltage Rating (DC)=50V, Width=0.8mm
R2: library part RC0603FR-076K8L, "Res Thick Film 0603 6.8K Ohm 1% 0.1W(1/10W) ±100ppm/C Pad SMD T/R", Case Code (Imperial)=0603, Case Code (Metric)=1608, Manufacturer=Yageo, Max Operating Temperature=155°C, Max Power Dissipation=100mW, Min Operating Temperature=-55°C, Package Quantity=1, Resistance=6k8, Supplier Part Number 1=603-RC0603FR-076K8L, Temperature Coefficient=100ppm/°C, Tolerance=1%, Voltage Rating=50V, Case/Package=0603, Category="Chip SMD Resistors", ComponentLink1Description=https://datasheet.ciiva.com/46412/443971-46412856.pdf?src-supplier=Element14, ComponentLink1URL=https://datasheet.ciiva.com/46412/443971-46412856.pdf?src-supplier=Element14, ComponentLink2Description=https://datasheet.ciiva.com/7746/443971-7746394.pdf?src-supplier=Element14, ComponentLink2URL=https://datasheet.ciiva.com/7746/443971-7746394.pdf?src-supplier=Element14, ComponentLink3Description=https://datasheet.ciiva.com/7746/443971-7746395.pdf?src-supplier=Element14, ComponentLink3URL=https://datasheet.ciiva.com/7746/443971-7746395.pdf?src-supplier=Element14, ComponentLink4Description=https://datasheet.ciiva.com/2454/pyu-r-int-thick-7-2454156.pdf?src-supplier=Digi-Key, ComponentLink4URL=https://datasheet.ciiva.com/2454/pyu-r-int-thick-7-2454156.pdf?src-supplier=Digi-Key, ComponentLink5Description=https://datasheet.ciiva.com/2454/pyu-r-int-thick-7-2454157.pdf?src-supplier=Digi-Key, ComponentLink5URL=https://datasheet.ciiva.com/2454/pyu-r-int-thick-7-2454157.pdf?src-supplier=Digi-Key, ComponentLink6Description=https://datasheet.ciiva.com/2454/pyu-r-int-thick-7-2454158.pdf?src-supplier=Digi-Key, ComponentLink6URL=https://datasheet.ciiva.com/2454/pyu-r-int-thick-7-2454158.pdf?src-supplier=Digi-Key, ComponentLink7Description=https://datasheet.ciiva.com/7983/443971-7983662.pdf?src-supplier=Element14, ComponentLink7URL=https://datasheet.ciiva.com/7983/443971-7983662.pdf?src-supplier=Element14, ComponentLink8Description=https://datasheet.ciiva.com/46371/1868787-46371519.pdf?src-supplier=Element14, ComponentLink8URL=https://datasheet.ciiva.com/46371/1868787-46371519.pdf?src-supplier=Element14, Composition="Thick Film", Depth=0.8mm, Features="Moisture Resistant", Height=0.022inch, Lead Free="Lead Free", Length=0.063inch, Manufacturer Part Number=RC0603FR-076K8L, Military Standard=Not, Number of Pins=2, Number of Terminations=2, Packaging="Tape and Reel", Power Rating=100mW, Pricing 1="1=0,10000, 10=0,01800, 100=0,00600, 1000=0,00500, 5000=0,00300, 10000=0,00300 (USD)", REACH SVHC="No SVHC", RoHS=Yes, Stock 1=241804, Supplier 1=Mouser, Supplier 2=Farnell, Supplier 3=Digi-Key, Supplier Part Number 2=2421883, Supplier Part Number 3=311-6.80KHRCT-ND, Termination=SMD/SMT, Voltage Rating (DC)=50V, Width=0.031inch
R3: library part CRCW06030000Z0EA, "RES SMD 0 OHM JUMPER 1/10W 0603", Manufacturer="Vishay Dale", Operating Temperature="-55°C ~ 155°C", Package / Case="0603 (1608 Metric)", Power (Watts)="0.1W, 1/10W", Supplier Device Package=0603, Supplier Part Number 1=71-CRCW0603-0-E3, Temperature Coefficient=-, Tolerance=Jumper, Category=Resistors, ComponentLink1Description=http://www.vishay.com/docs/20035/dcrcwe3.pdf, ComponentLink1URL=http://www.vishay.com/docs/20035/dcrcwe3.pdf, Composition="Thick Film", Failure Rate=-, Features="Automotive AEC-Q200", Height - Seated (Max)="0.020\" (0.50mm)", Manufacturer Part Number=CRCW06030000Z0EA, Packaging="Cut Tape (CT)", Part Status=Active, Pricing 1="1=0.1, 10=0.028, 25=0.0204, 50=0.0154, 100=0.0114, 250=0.00868, 500=0.00694, 1000=0.00511 (USD)", Resistance=0R, RoHS="RoHS Compliant", Size / Dimension="0.063\" L x 0.033\" W (1.60mm x 0.85mm)", Stock 1=0, Supplier 1=Mouser, Supplier 2=Farnell, Supplier 3=Digi-Key, Supplier Part Number 2=1469739, Supplier Part Number 3=541-0.0GCT-ND
R4 R5: library part RC0603FR-07100KL, "RES SMD 100K OHM 1% 1/10W 0603", Manufacturer=Yageo, Operating Temperature="-55°C ~ 155°C", Package / Case="0603 (1608 Metric)", Power (Watts)="0.1W, 1/10W", Resistance=100k, Supplier Device Package=0603, Supplier Part Number 1=603-RC0603FR-07100KL, Temperature Coefficient=±100ppm/°C, Tolerance=±1%, Category=Resistors, ComponentLink1Description=http://www.yageo.com/documents/recent/PYu-RC_Group_51_RoHS_L_8.pdf, ComponentLink1URL=http://www.yageo.com/documents/recent/PYu-RC_Group_51_RoHS_L_8.pdf, Composition="Thick Film", Failure Rate=-, Features="Moisture Resistant", Height - Seated (Max)="0.022\" (0.55mm)", Manufacturer Part Number=RC0603FR-07100KL, Packaging="Cut Tape (CT)", Part Status=Active, Pricing 1="1=0.1, 10=0.015, 100=0.006, 1000=0.00268, 2500=0.00233 (USD)", RoHS="RoHS Compliant", Size / Dimension="0.063\" L x 0.032\" W (1.60mm x 0.80mm)", Stock 1=14618646, Supplier 1=Mouser, Supplier 2=Farnell, Supplier 3=Digi-Key, Supplier Part Number 2=9238727, Supplier Part Number 3=311-100KHRCT-ND
U1: "Amplifier, Power, 0.4–0.5 GHz, 41.0 dB, 34.8 dBm, 3.0 x 3.0 mm QFN-16", Manufacturer="Guerrilla RF", Supplier Part Number 1=459-GRF5504, Category=LDO, Manufacturer Part Number=GRF5504, Pricing 1="1=6.08, 10=5.78, 50=5.78, 100=5.33, 1000=2.39, 10000=2.03 (USD)", RoHS=No, Stock 1=6789, Supplier 1=Mouser, Supplier 2="Richardson RFPD", Supplier Part Number 2=GRF5504

## Via types
v1: diameter 0.6, hole 0.3, Top Layer to Bottom Layer, 111 vias
v2: diameter 1.4, hole 1, Top Layer to Bottom Layer, 12 vias
v3: diameter 0.5, hole 0.2, Top Layer to Bottom Layer, 5 vias

## Nets (pads, with @x,y where several pads share a name; then routed paths per layer and width w, separated by ;. In a path a pad name is that pad's centre, name@x,y a point inside that pad or via, vN(x,y) a via of type N, cw(c..) or ccw(c..) an arc to the next point about the centre after c; other vN are vias at no path point)
+5V: C1.1 C2.1 C8.1 C9.1 C10.1 C11.1 J3.2 J4.1 L1.2 L5.1 Q1.2 R3.1 R4.2 | length 48.1
  Top Layer w0.2: v1(28.5,16.7) 29.075,16.7 Q1.2 ; v1(30.9,14.5) R4.2
  Top Layer w0.4: C10.1 19.175,17.075 19.175,17.2 v1(19.7,17.5) ; C1.1 20.875,17.075 20.875,17.2 v1(21.5,17.5) ; C2.1 22.575,17.075 22.575,17.2 v1(23.2,17.5) ; C8.1 24.275,17.075 24.275,17.2 v1(24.8,17.5) 25.2,17.2 25.425,17.075 C11.1
  Bottom Layer w0.5: v1(30.9,14.5) v1(28.5,16.7) v1(24.8,17.5) v1(19.7,17.5) 17.417,13.824 ccw(c18.1,13.4) 17.339,13.659 15.5,8.25 C9.1 15.5,7.76 21.45,7.76 J4.1 23.05,7.1 25.345,6.456 ccw(c25.75,7.9) 26.005,6.422 31.96,7.45 J3.2
"+5V BIAS": Q1.3 R1.1 R2.1 | length 4.2
  Top Layer w0.2: Q1.3 26.925,16.275 26.876,18.069 R2.1 26.876,18.269 27.722,18.269 R1.1
GND: C1.2 C2.2 C6.1 C7.1 C8.2 C9.2 C10.2 C11.2 J1.2 J1.3 J1.4 J2.2 J2.3 J2.4 J4.2 L2.1 L3.1 Q2.2 R5.1 U1.2 U1.5 U1.6 U1.7 U1.8 U1.11 U1.14 U1.15 U1.17 | length 8.5
  Top Layer w0.2: C6.1 12.7,25.175 v1(12.7,25.8) ; C7.1 14.4,25.175 v1(14.4,25.8) ; v1(18.9,14.6) 18.9,15.225 C10.2 ; v1(20.6,14.6) 20.6,15.225 C1.2 ; v1(22.3,14.6) 22.3,15.225 C2.2 ; v1(24,14.6) 24,15.225 C8.2 ; v1(25.7,14.6) 25.7,15.225 C11.2 ; L3.1 28.6,25.275 v1(28.6,25.9) ; Q2.2@30.075,20.275 Q2.2 ; L2.1 33,25.275 v1(33,25.9)
  Top Layer w0.3: v1(33.1,17.5) R5.1
  other v1: 4,2 8,2 12,2 16,2 20,2 24,2 28,2 32,2 36,2 40,2 6,6 10,6 14,6 18,6 22,6 30,6 38,6 42,6 4,10 8,10 12,10 20,10 24,10 28,10 40,10 27.4,13.2 29.3,13.2 31.9,13.3 18.1,13.4 20.8,13.4 23.5,13.4 26.2,13.4 6,14 10,14 14,14 34,14 38,14 42,14 33.5,16.6 8,18 12,18 16,18 17.3,18 36,18 34.8,19 18.8,19.5 21.5,19.5 29.425,20.275 25.337,20.675 43,21 22.5,21.1 28.7,21.3 1,22 6,22 9.4,22 12.1,22 14.8,22 17.5,22 20.2,22 21.6,22 33,22 34,22 38,22 27.7,22.2 22.9,22.3 8.5,22.6 1,25 23.4,25 31.5,25 43,25 9.9,25.1 16.8,25.1 19.5,25.1 22.3,25.1 29.9,25.1 26.4,25.3 4,26 8,26 12,26 16,26 20,26 24,26 32,26 36,26 6,30 10,30 14,30 18,30 22,30 26,30 30,30 34,30 38,30 42,30
  other v2: 39.9,18.7 41.5,18.7 43.1,18.7 0.9,19.2 2.5,19.2 4.1,19.2 39.9,27.3 41.5,27.3 43.1,27.3 0.9,27.8 2.5,27.8 4.1,27.8
  other v3: 24.9,22.5 25.7,22.5 25.3,22.9 24.9,23.3 25.7,23.3
NetC5_2: C5.2 J2.1 | length 6.9
  Top Layer w0.342: J2.1 9.496,23.5 C5.2
NetL5_2: L5.2 U1.13 | length 1.8
  Top Layer w0.2: U1.13 24.55,20.075 L5.2
NetQ1_1: Q1.1 Q2.3 R4.1 | length 3.4
  Top Layer w0.2: Q1.1 29.675,15.625 29.836,15.869 30.525,16.675 R4.1 Q2.3
NetR3_2: R3.2 U1.12 | length 2.7
  Top Layer w0.2: R3.2 23.707,20.027 23.707,22.15 U1.12
"PA BIAS ON": J3.1 Q2.1 R5.2 | length 16.8
  Top Layer w0.2: v1(29.6,14.4) 30.021,15.003 ccw(c29.775,15.175) 30.073,15.144 30.127,15.656 cw(c30.425,15.625) 30.33,15.91 31.47,16.29 ccw(c31.375,16.575) 31.675,16.571 31.725,19.975 Q2.1 31.725,20.175 32.725,20.175 R5.2
  Bottom Layer w0.5: v1(29.6,14.4) 33.8,9.25 J3.1
"PA EN1": R1.2 U1.1 | length 3
  Top Layer w0.2: U1.1 27.048,22.15 ccw(c27.7,22.2) 27.087,21.971 27.208,21.649 cw(c27.02,21.579) 27.211,21.641 27.211,21.64 27.722,20.021 R1.2
"PA EN2": R2.2 U1.16 | length 1.9
  Top Layer w0.2: U1.16 26.05,21.15 26.126,20.019 R2.2
"PA IN": C3.2 C4.2 J1.1 L2.2 | length 11.5
  Top Layer w0.342: C4.2 C3.2 31.704,23.501 34.832,23.501 cw(c34.832,22.132) 35.8,23.1 ccw(c36.041,23.341) 36.041,23 J1.1
"PA MATCH IN": C3.1 C4.1 L3.2 U1.3 U1.4 | length 5.6
  Top Layer w0.3: U1.3 U1.4
  Top Layer w0.342: 26.7,23.4 28.296,23.4 L3.2 28.904,23.52 29.896,23.52 C3.1 C4.1
"PA MATCH OUT": C5.1 C6.2 C7.2 L4.2 | length 4.7
  Top Layer w0.342: C5.1 L4.2
RF+5V: L1.1 L4.1 U1.9 U1.10 | length 7.2
  Top Layer w0.2: U1.10 U1.9
  Top Layer w0.342: L4.1 L1.1 22.129,23.4 23.875,23.4 24.1,23.4

## Polygon pours and split planes (outlines as drawn)
GND on Layer 2 "GND_L03_P000" (solid, pour order 0): 0,0 0,35 44,35 44,0
GND on Top Layer "GND_L01_P001" (solid, pour order 1): 0,0 0,35 44,35 44,0
GND on Bottom Layer "GND_L04_P002" (solid, pour order 2): 0,0 0,35 44,35 44,0
GND on Layer 1 "GND_L02_P003" (solid, pour order 3): 0,0 0,35 44,35 44,0

## Other copper
Top Layer:
  rectangle net +5V: 18.4,17 25.4,18.4
  pour cut-out: 9.2,22.5 9.2,24.3 24.1,24.3 24.1,22.5
  pour cut-out: 26.8,24.3 33,24.3 33,22.705 27.56,22.71 26.802,22.715
  pour cut-out: 15.398,24.002 15.398,22.798 17.802,22.798 17.802,24.002
  pour cut-out: 32.025,21.175 29.598,21.198 29.598,22.402 32.028,22.398
  pour cut-out: 41.25,23.48 44,23.5 44,22.5 41.25,22.52
  pour cut-out: 2.75,23.98 0,24 0,23 2.75,23.02

## Silkscreen, mask and mechanical layers (free items; w line width, h text height)
Top Overlay:
  text "446MHz 34dBm PA" at 12.4,32.3 h1.5
  text "RF OUT" at 7.8,20.2 h1.5 r90
  text "RF IN" at 37.8,20.2 h1.5 r90
  text "PA ON" at 30.2,11.2 h1.5
  text "+5V" at 22.962,9.639 h1.5 r90
  text "GND" at 26.587,9.568 h1.5 r90
  text "20241021" at 31.3,1.4 h1.5
Mechanical 1:
  the board outline again, w0.1

## Text inside footprints (layer, text, board x,y; h text height)
C9: Top Overlay "+" at 15.7,8.8 h1.5 r90